# Altium PCB Test board TG21.A_B.PcbDoc
Units mm, origin at the board's own origin, x right, y up, seen from the top; angles counter-clockwise.
Board outline 53.97 x 91.95 mm, 2 copper layers (Top Layer, Bottom Layer); 10 components, 8 nets, 29 pads, 0 vias.
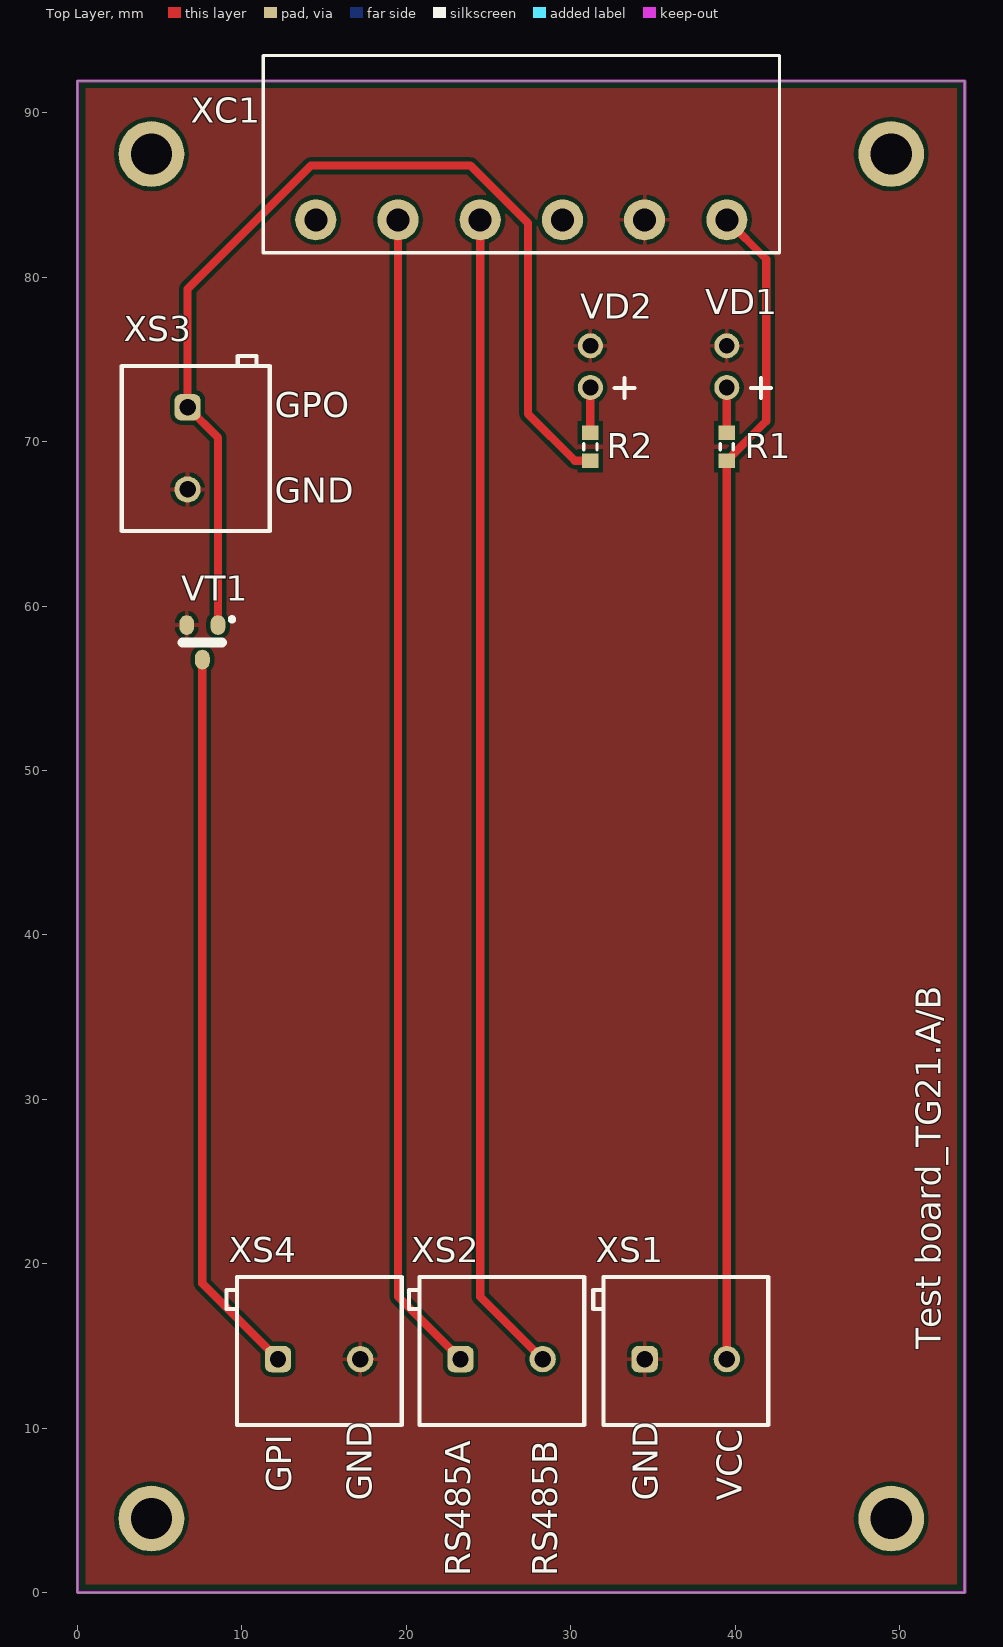
[diagram p0: Top Layer view]
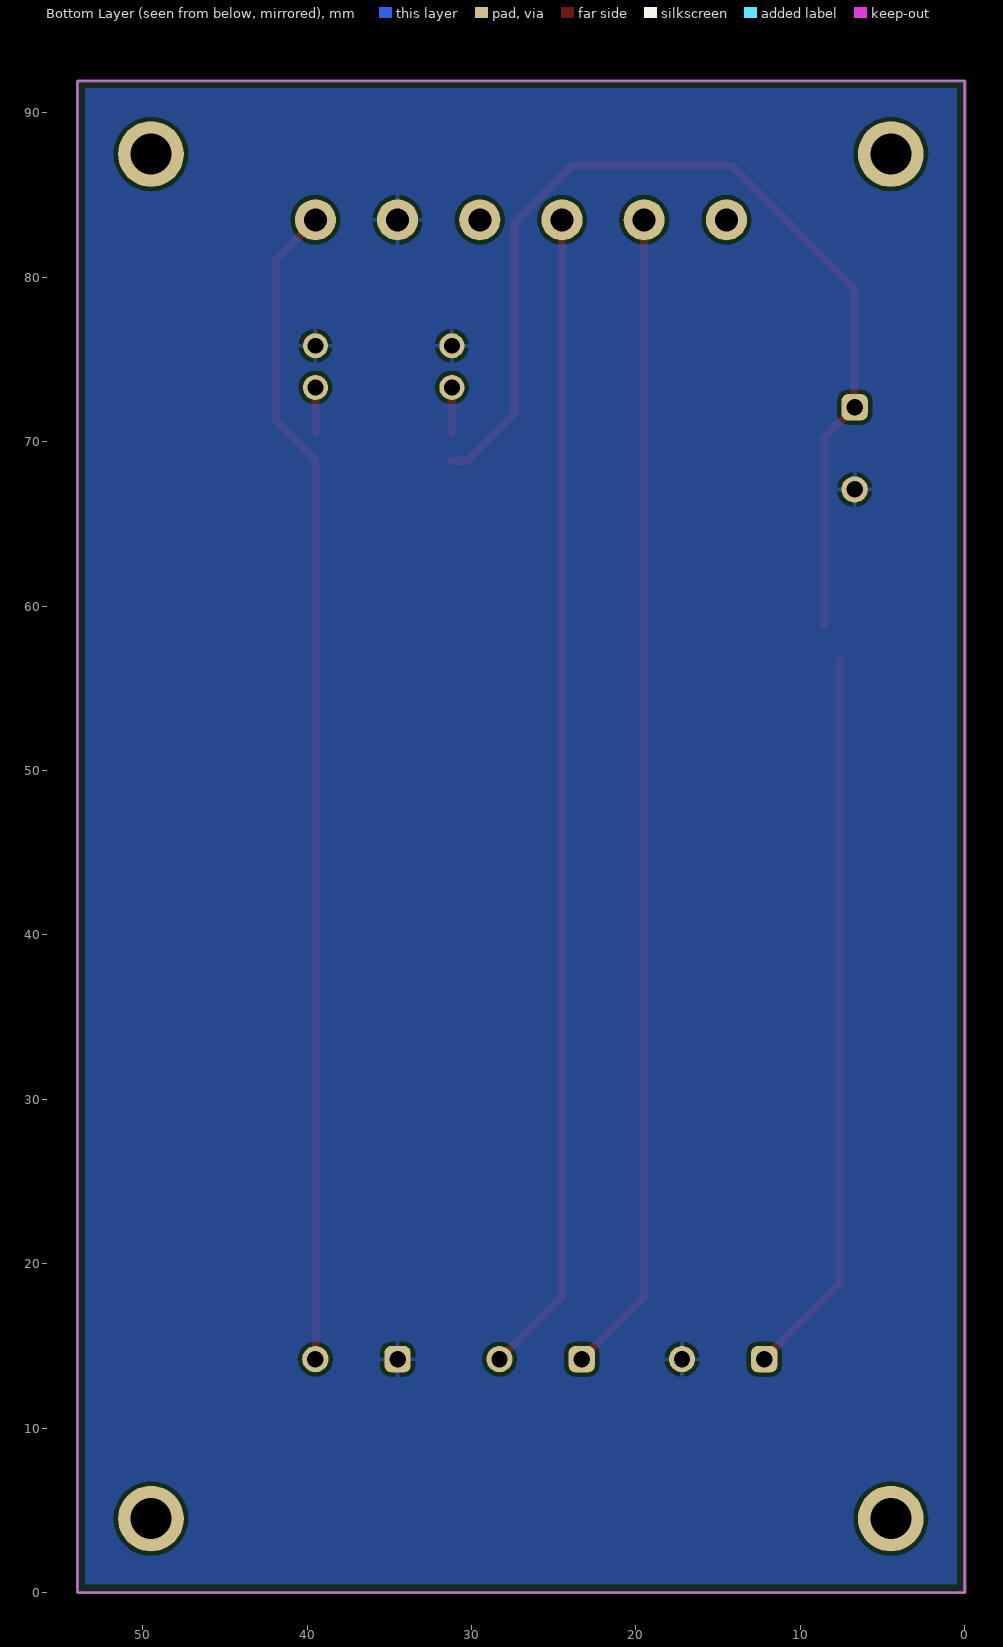
[diagram p1: Bottom Layer view, seen from below]
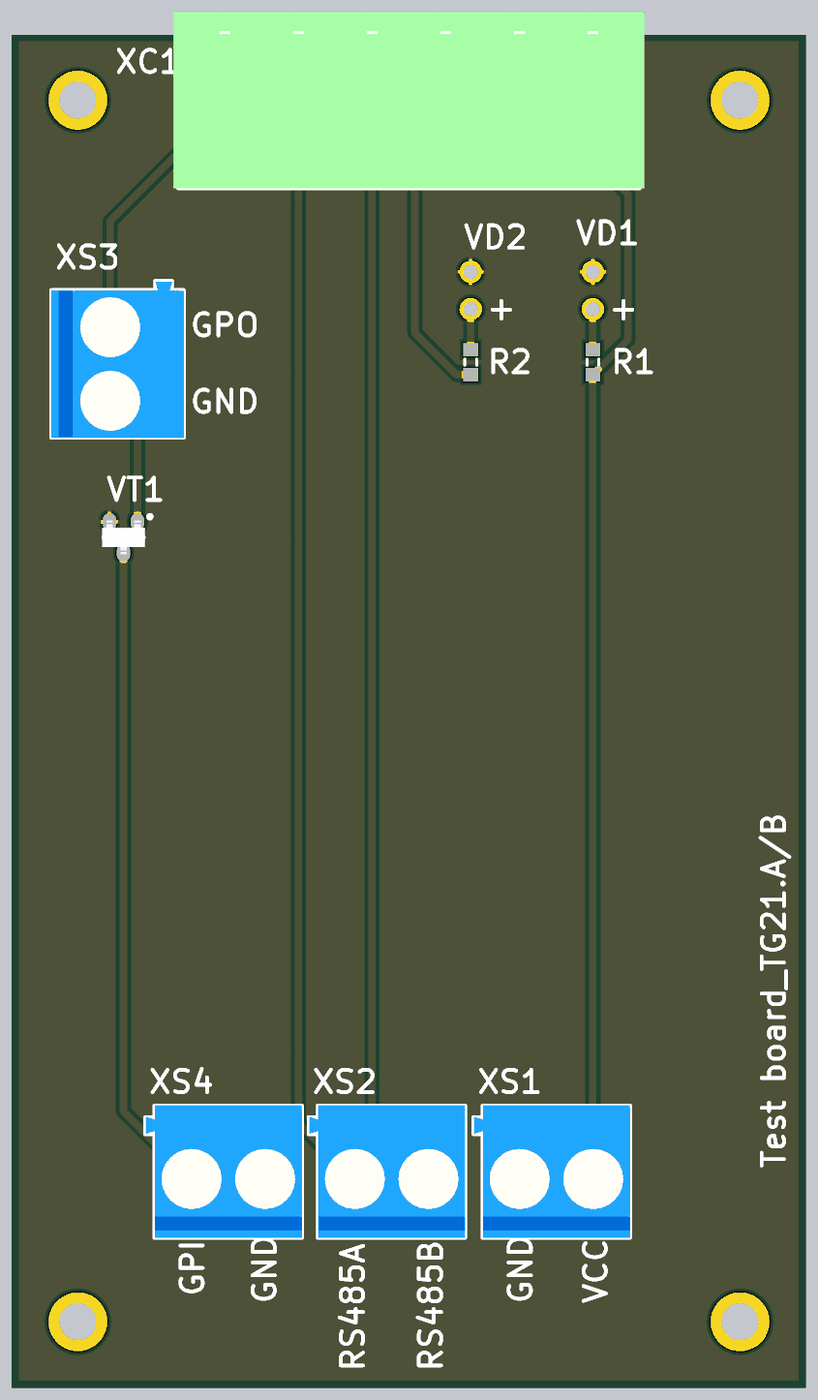
[diagram p2: 3D render of the assembled board from above, using the file's embedded part models]

## Layer stack, top to bottom
Top Solder: solder mask 0.0102, Solder Resist, Dk 3.5
Top Layer: signal copper 0.0356
Dielectric 1: dielectric 0.32, FR-4, Dk 4.8
Bottom Layer: signal copper 0.0356
Bottom Solder: solder mask 0.0102, Solder Resist, Dk 3.5

## Board outline
0,0 53.975,0 53.975,91.948 0,91.948

## Design rules (kind name [scope] priority, off if disabled: settings)
Clearance [All] p1: gap=0.254
PolygonConnect [All] p1: connectstyle=Relief reliefconductorwidth=0.254 reliefentries=4 polygonreliefangle="90 Angle" airgapwidth=0.254
RoutingVias [All] p1: holewidth=0.711 width=1.27 viastyle="Through Hole" minholewidth=0.711 minwidth=1.27 maxholewidth=0.711 maxwidth=1.27
SolderMaskExpansion [All] p1: expansion=0.102
Width [All] p1: maxlimit=0.5 minlimit=0.5 preferedwidth=0.5
29 further rules are at their usual default settings.

## Components (designator, comment, footprint, x,y, rotation, side; value= is the part's Value field where it differs from the comment)
R1 "R0603" RESC0603N 39.5,69.7 r270 top
R2 "R0603" RESC0603N 31.2,69.7 r90 top
VD1 "L-H311G (DIP)" L-H311 39.5,73.3 r180 top
VD2 "L-H311G (DIP)" L-H311 31.2,73.3 r180 top
VT1 "MMUN2211LT1G (SOT-23)" "SOT95P230-3N (SOT-23)" 7.6,57.8 r270 top
XC1 "WEILAND 25.332.3653.0" WEILAND_25.332.3653.0 39.5,83.5 r90 top
XS1 "Degson 305-021-11" 305-021-11 37.1,14.6 r0 top
XS2 "Degson 305-021-11" 305-021-11 25.9,14.6 r0 top
XS3 "Degson 305-021-11" 305-021-11 7.1,69.5 r270 top
XS4 "Degson 305-021-11" 305-021-11 14.8,14.6 r0 top

## Footprints (in the part's own frame and the unit in brackets; to place one, negate y for a bottom-side part, rotate by r counter-clockwise, add the part's x,y. Pads: shape width x height; smd on the part's side, far side on the other; paste and mask are expansions set on the pad)
305-021-11 [mm] "Клеммник 2 контакта"
  rrect50% 1.6x1.6 hole 1: 1(-2.6,-0.4)
  round 1.6 hole 1: 2(2.4,-0.4)
  silkscreen extent -5.72,-4.4 4.93,4.6, body extent -5.68,-4.4 4.92,4.6, height 12.5
L-H311 [mil]
  round 60 hole 38: 1(0,0) 2(0,-100)
  silkscreen extent -106,-22 -58,25
RESC0603N [mm] "Chip Resistor, Body 1.6x0.8mm, IPC Medium Density"
  rect 0.9x1 smd: 1(-0.85,0) 2(0.85,0)
  silkscreen extent -0.2,-0.4 0.2,0.4, body extent -0.85,-0.48 0.85,0.48, height 0.6
"SOT95P230-3N (SOT-23)" [mm]
  oval 1.2x0.9 smd: b(-1.05,0.95) c(1.05,0) e(-1.05,-0.95)
  silkscreen extent -1.52,-1.2 0,1.92, body extent -1.15,-1.45 1.15,1.45, height 1
WEILAND_25.332.3653.0 [mm] "WEILAND_6PIN_5MM"
  round 2.5 hole 1.4: 1(0,0) 2(0,5) 3(0,10) 4(0,15) 5(0,20) 6(0,25)
  silkscreen extent -2,-3.2 10,28.2, body extent -2,-3.5 10,28.5, height 8.5

## Part data
VD1 VD2: library part L-H311G, "L-H311G"
VT1: library part MUN2211T1, "MUN2211T1"
XC1: library part WEILAND_6PIN_5MM, "WEILAND_6PIN_5MM"
XS1 XS2 XS3 XS4: library part 305-021-11, "Клеммник винтовой, 2-контактный, 5мм, прямой"

## Free pads (board coordinates)
  round 4 hole 2.5: 0(4.5,4.5) 0(4.5,87.5) 0(49.5,4.5) 0(49.5,87.5)

## Nets (pads, with @x,y where several pads share a name; then routed paths per layer and width w, separated by ;. In a path a pad name is that pad's centre, name@x,y a point inside that pad or via, vN(x,y) a via of type N, cw(c..) or ccw(c..) an arc to the next point about the centre after c; other vN are vias at no path point)
GND: VD1.2 VD2.2 VT1.e XC1.2 XS1.1 XS3.2 XS4.2
GPI: VT1.c XS4.1 | length 44.5
  Top Layer w0.5: VT1.c 7.6,18.8 XS4.1
GPO: R2.1 VT1.b XS3.1 | length 63.1
  Top Layer w0.5: VT1.b 8.55,70.25 XS3.1 6.7,79.3 14.2,86.8 23.9,86.8 27.4,83.3 27.4,71.7 30.25,68.85 R2.1
NetR1_1: R1.1 VD1.1 | length 2.8
  Top Layer w0.5: R1.1 VD1.1
NetR2_2: R2.2 VD2.1 | length 2.8
  Top Layer w0.5: R2.2 VD2.1
RS485A: XC1.5 XS2.1 | length 70.9
  Top Layer w0.5: XC1.5 19.5,18 XS2.1
RS485B: XC1.4 XS2.2 | length 70.9
  Top Layer w0.5: XC1.4 24.5,18 XS2.2
VCC: R1.2 XC1.1 XS1.2 | length 71.3
  Top Layer w0.5: XS1.2 R1.2 41.9,71.25 41.9,81.1 XC1.1
pads on no net: XC1.3 XC1.6

## Polygon pours and split planes (outlines as drawn)
GND on Top Layer "Top Layer-No Net" (solid, pour order 4): 0.5,91.5 53.5,91.5 53.5,0.5 0.5,0.5
GND on Bottom Layer "Top Layer-No Net" (solid, pour order 6): 0.5,91.5 53.5,91.5 53.5,0.5 0.5,0.5

## Keep-outs
Keep-Out Layer:
  the board outline again, w0.2

## Silkscreen, mask and mechanical layers (free items; w line width, h text height)
Top Overlay:
  text "GPO" at 12,71.5 h1.52
  text "GND" at 12,66.3 h1.52
  text "Test board_TG21.A/B" at 52.5,14.8 h1.52 r90
  text "GPI" at 13,6.1 h1.52 r90
  text "GND" at 17.9,5.6 h1.52 r90
  text "GND" at 35.3,5.6 h1.52 r90
  text "VCC" at 40.4,5.6 h1.52 r90
  text "RS485A" at 23.9,1 h1.52 r90
  text "RS485B" at 29.2,1 h1.52 r90